# EAGLE board USB2Serial-CH340G-v1.0 (EAGLE 9.6.2)

Size 25.38 x 25.07 mm. Coordinates in mm from the lower left corner, seen from the top.
Outline: 0,0 25.38,0 25.38,25.07 0,25.07 0,0
Copper layers (1*16): Top 0.035mm / dielectric 1.5mm / Bottom 0.035mm
Design rules "default *": minimum track width 6mil, minimum drill 0.35mm, track to track 6mil, track to pad 6mil, pad to pad 6mil, via to via 6mil, smd to smd 6mil, copper to edge 10mil, drill to drill 6mil, minimum pad ring 10mil, minimum via ring 8mil, stop-mask expansion 4mil, vias tented up to drill 20mil, thermal gap 10mil
Net classes: 1 XUSB: width 0.305 mm; 2 USB: width 0.305 mm; 3 POWER: width 0.305 mm

## Footprints (pad centres in the part's own frame; a part is rotated, then mirrored left to right if it is on the bottom)
C0805 = smd 1.3 x 1.5: 1 -0.95,0; 2 0.95,0
C0402 = smd 0.7 x 0.9: 1 -0.65,0; 2 0.65,0
1X06_NO_SILK = drill 1.016 pad 1.88: 1 0,0; 2 2.54,0; 3 5.08,0; 4 7.62,0; 5 10.16,0; 6 12.7,0
MOLEX_47346-0001 = smd 0.45 x 1.38: 1 -1.3,2.66; 2 -0.65,2.66; 3 0,2.66; 4 0.65,2.66; 5 1.3,2.66 | smd 1.475 x 2.1: SH1 -2.462,2.3; SH2 2.462,2.3 | smd 2.375 x 1.9: SH3 -2.913,0; SH6 2.913,0 | smd 1.175 x 1.9: SH4 -0.838,0; SH5 0.838,0
MF-SMDF050 = smd 1.5 x 4.6: 1 -2.45,0; 2 2.45,0
SOT223 = smd 1.5 x 2: 1 -2.3,-3.15; 2 0,-3.15; 3 2.3,-3.15 | smd 3.8 x 2: 4 0,3.15
WE-CBA_0805(W=4) = smd 1.4 x 1: 1 -1.3,0; 2 1.3,0
SML0603 = smd 0.8 x 0.8: A 0.75,0; C -0.75,0
3.2X2.5_KX-7 = smd 1.3 x 1.1: 1 -1.15,-0.9; 2 1.15,-0.9; 3 1.15,0.9; 4 -1.15,0.9
R0402 = smd 0.6 x 0.7: 1 -0.5,0; 2 0.5,0
SJ_2FI = smd 1.016 x 1.575: 1 -1.6,0; 2 0,0; 3 1.6,0
SO016 = smd 0.6 x 1.2: 1 -4.445,-2.8; 2 -3.175,-2.8; 3 -1.905,-2.8; 4 -0.635,-2.8; 5 0.635,-2.8; 6 1.905,-2.8; 7 3.175,-2.8; 8 4.445,-2.8; 9 4.445,2.8; 10 3.175,2.8; 11 1.905,2.8; 12 0.635,2.8; 13 -0.635,2.8; 14 -1.905,2.8; 15 -3.175,2.8; 16 -4.445,2.8

## Placement (x,y rotation side)
C3  47uF  [C0805]  15.24,3.81 270 top
C5  100nF  [C0402]  7.62,10.16 180 top
C6  100nF  [C0402]  12.7,3.81 270 top
C7  100nF  [C0402]  17.78,3.81 90 top
C9  12pF  [C0402]  17.78,13.97 0 top
C10  12pF  [C0402]  17.78,19.05 180 top
CN1  UART  [1X06_NO_SILK]  22.86,19.05 270 top
CN2  47346-0001  [MOLEX_47346-0001]  1.27,12.7 270 top
F2  1812L050/30PR  [MF-SMDF050]  5.08,21.59 0 top
IC1  AMS1117-3.3  [SOT223]  5.08,3.81 90 top
L2  GZ2012D601TF  [WE-CBA_0805(W=4)]  10.16,21.59 270 top
LED1  GREEN  [SML0603]  13.97,22.86 270 top
LED2  BLUE  [SML0603]  16.51,22.86 270 top
LED3  BLUE  [SML0603]  19.05,22.86 270 top
Q1  12MHz  [3.2X2.5_KX-7]  17.78,16.51 270 top
R1  22R  [R0402]  7.62,13.97 0 top
R2  22R  [R0402]  7.62,12.7 0 top
R7  1K  [R0402]  15.24,22.86 90 top
R8  1K  [R0402]  17.78,22.86 90 top
R9  1K  [R0402]  20.32,22.86 270 top
SJ1  [SJ_2FI]  21.59,2.54 0 bottom
U1  CH340G  [SO016]  12.7,12.7 90 top

## Library data of the parts
C3 C5-C7 C9 C10 = rcl; SPICEPREFIX: C
CN1 = SparkFun-Connectors; PROD_ID: CONN-08437
CN2 = SnapEDA-Library; MANUFACTURER: Molex
F2 = fuse
IC1 = v-reg
L2 = Wurth_Automotive_WE-CBA; DATASHEET-URL: https://www.we-online.com/catalog/datasheet/782853102.pdf; IR1: 1000mA; MOUNT: SMT; PART-NUMBER: 782853102; RDC-MAX: 0.3Ohm; TYPE: High Current; ZMAX: 1000Ohm
LED1-LED3 = led
Q1 = crystal-geyer_V1_0
R1 R2 R7-R9 = rcl; SPICEPREFIX: R
SJ1 = _my_jumpers
U1 = SparkFun-IC-Comms; PROD_ID: IC-13498

## Nets
3.3V [POWER]: C3.1 C6.1 IC1.4 SJ1.3
5V [POWER]: C5.1 IC1.3 L2.2 LED1.A LED2.A LED3.A SJ1.1
GND [POWER]: C3.2 C5.2 C6.2 C7.1 C9.1 C10.1 CN1.6 CN2.5 IC1.1 R7.1 U1.1
N$4: F2.2 L2.1
N$6: C7.2 U1.4
N$7: LED1.C R7.2
N$9: LED3.C R9.2
N$10: LED2.C R8.2
UART_CTS: CN1.5 U1.9
UART_DTR: CN1.1 U1.13
UART_RX: CN1.2 R8.1 R9.1 U1.3
UART_TX: CN1.3 U1.2
USB_D_M [USB]: R1.2 U1.6
USB_D_P [USB]: R2.2 U1.5
USB_OSC_IN: C9.2 Q1.3 U1.7
USB_OSC_OUT: C10.2 Q1.1 U1.8
USB_SHIELD: CN2.SH1 CN2.SH2 CN2.SH3 CN2.SH4 CN2.SH5 CN2.SH6
VCC: CN1.4 SJ1.2 U1.16
XUSB [POWER]: CN2.1 F2.1
XUSB_D_M [XUSB]: CN2.2 R1.1
XUSB_D_P [XUSB]: CN2.3 R2.1

## Tracks (layer width: path | path; a pad name or v marks a point on that pad's centre or on a via)
3.3V  (3 unrouted)
5V  (6 unrouted)
GND  (10 unrouted)
N$4  (1 unrouted)
N$6  (1 unrouted)
N$7  (1 unrouted)
N$9  (1 unrouted)
N$10  (1 unrouted)
UART_CTS  (1 unrouted)
UART_DTR  (1 unrouted)
UART_RX  (3 unrouted)
UART_TX  (1 unrouted)
USB_D_M  (1 unrouted)
USB_D_P  (1 unrouted)
USB_OSC_IN  (2 unrouted)
USB_OSC_OUT  (2 unrouted)
USB_SHIELD  (5 unrouted)
VCC  (2 unrouted)
XUSB  (1 unrouted)
XUSB_D_M  (1 unrouted)
XUSB_D_P  (1 unrouted)